# Altium PCB E1811SENSE_2.PcbDoc
Units mil, origin at the board's own origin, x right, y up, seen from the top; angles counter-clockwise.
Board outline 900 x 1630 mil, 4 copper layers (L1 (Sig), L2 (GND), L3 (GND), L4 (Sig)), stack 42.334 mil thick; 45 components, 35 nets, 181 pads, 52 vias.
Unrouted connection lines stored in the file: 11.
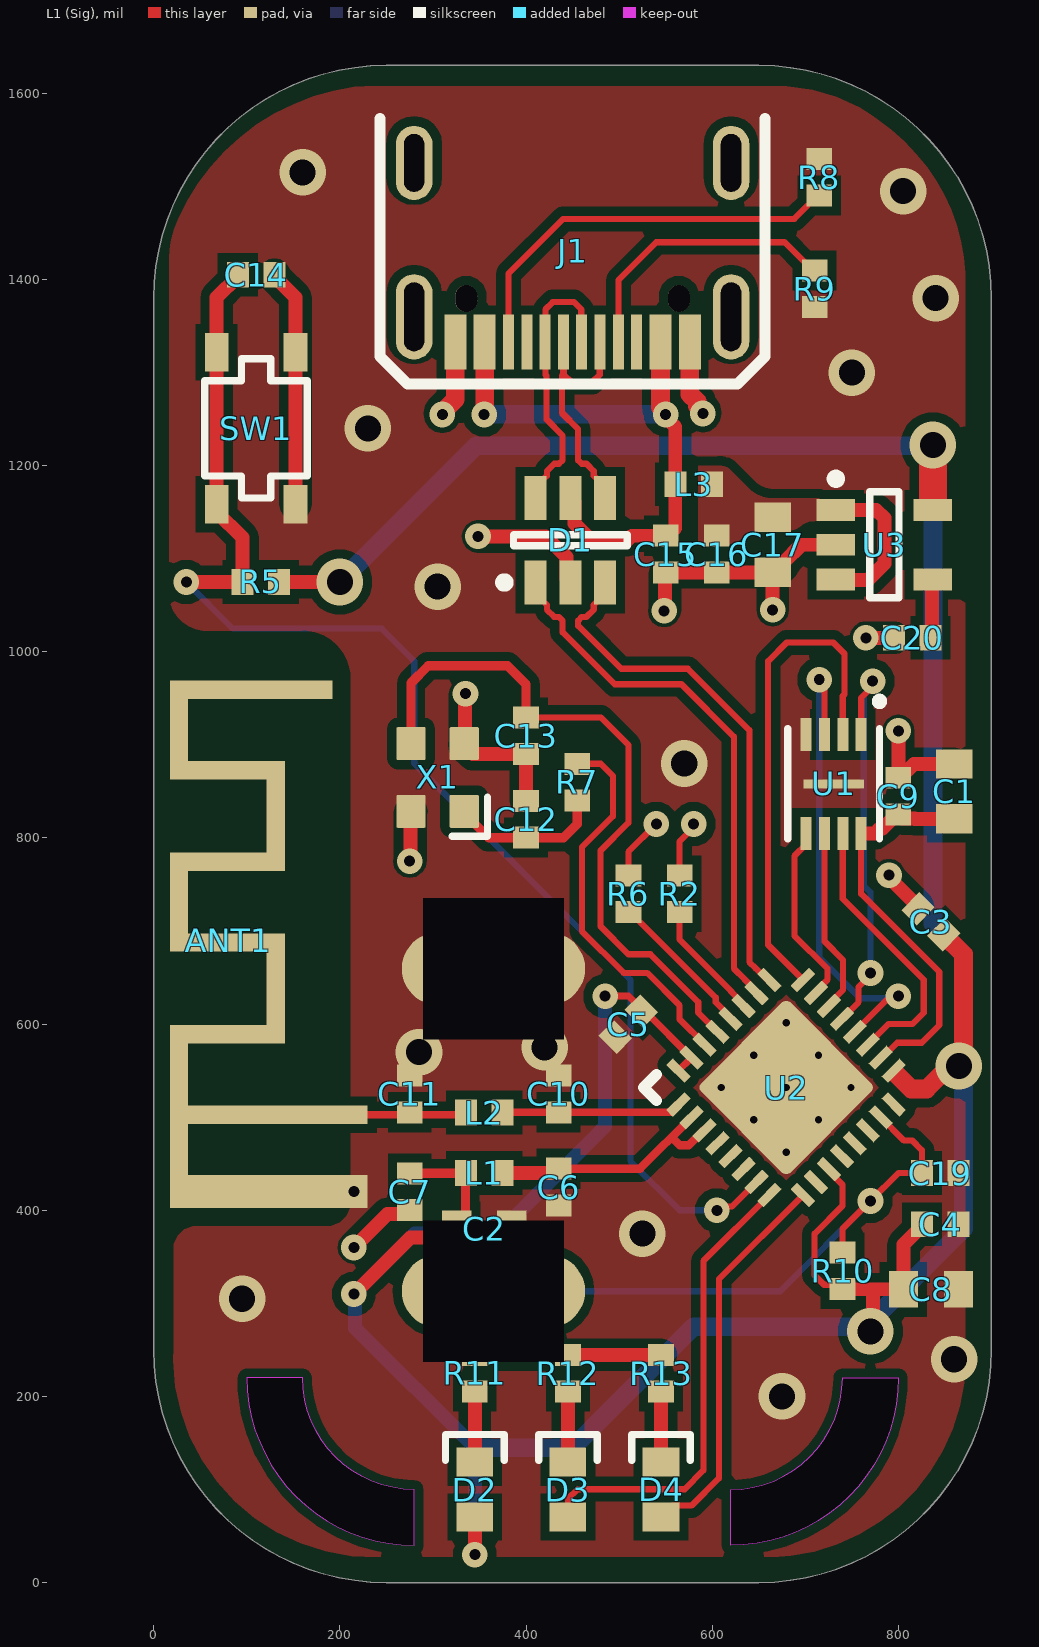
[diagram p0: L1 (Sig) view]
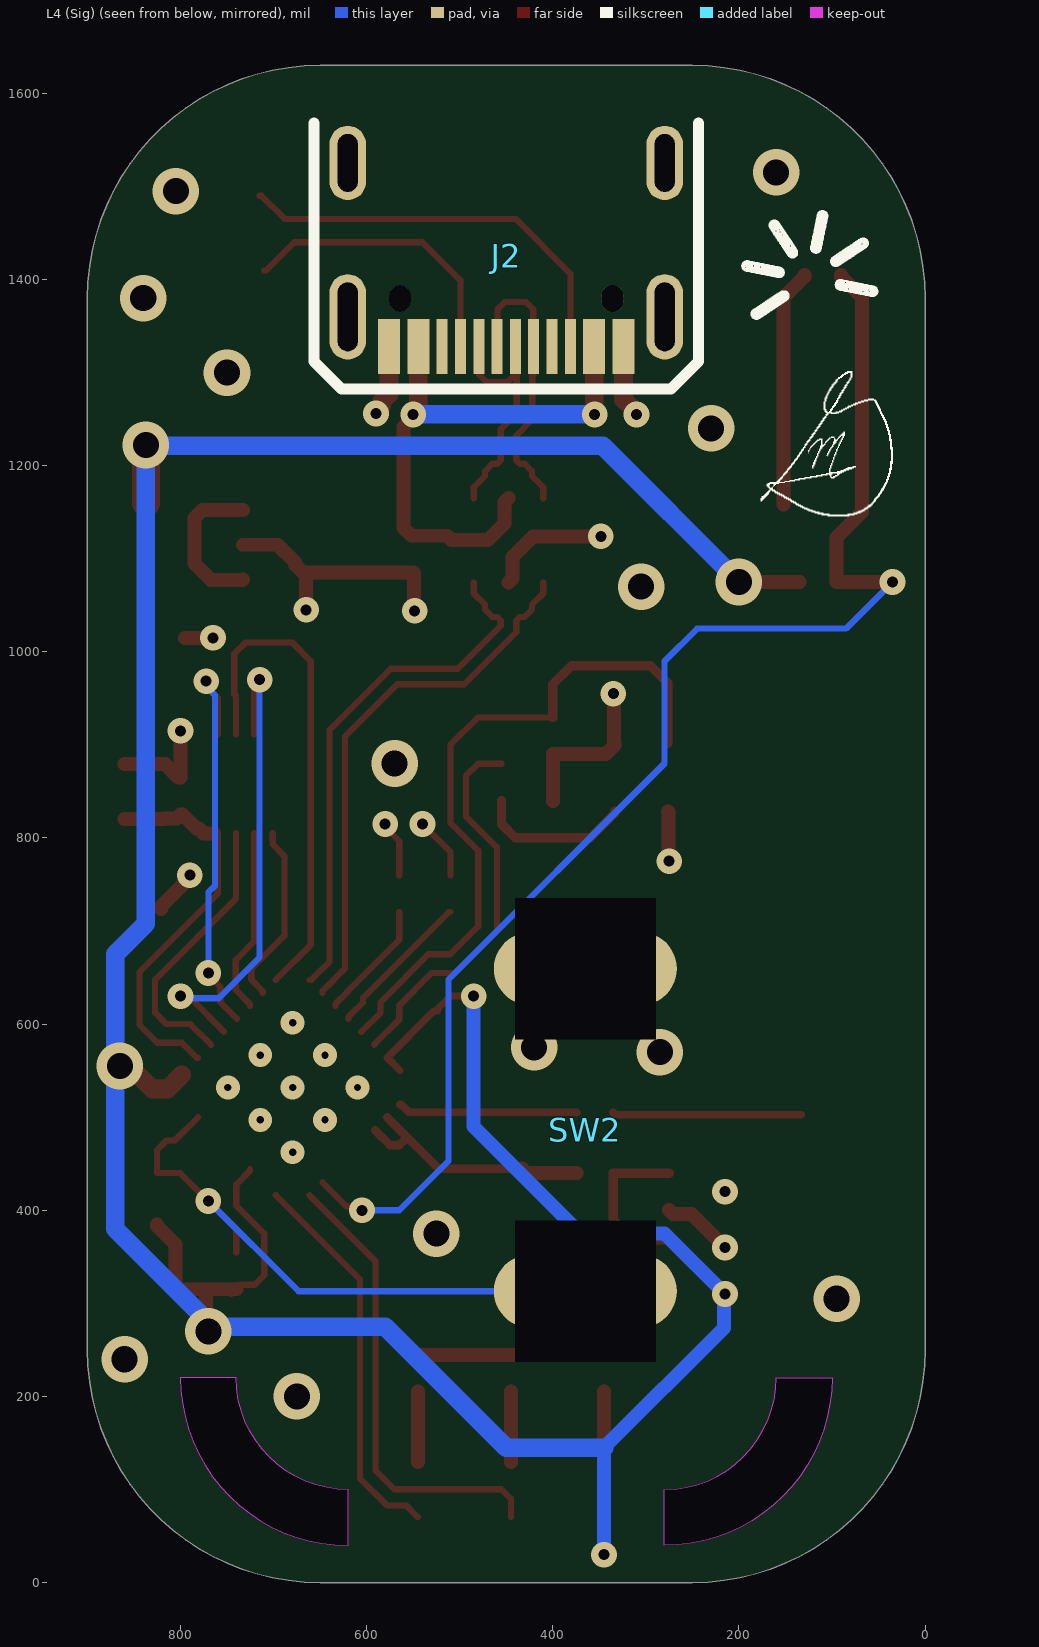
[diagram p1: L4 (Sig) view, seen from below]
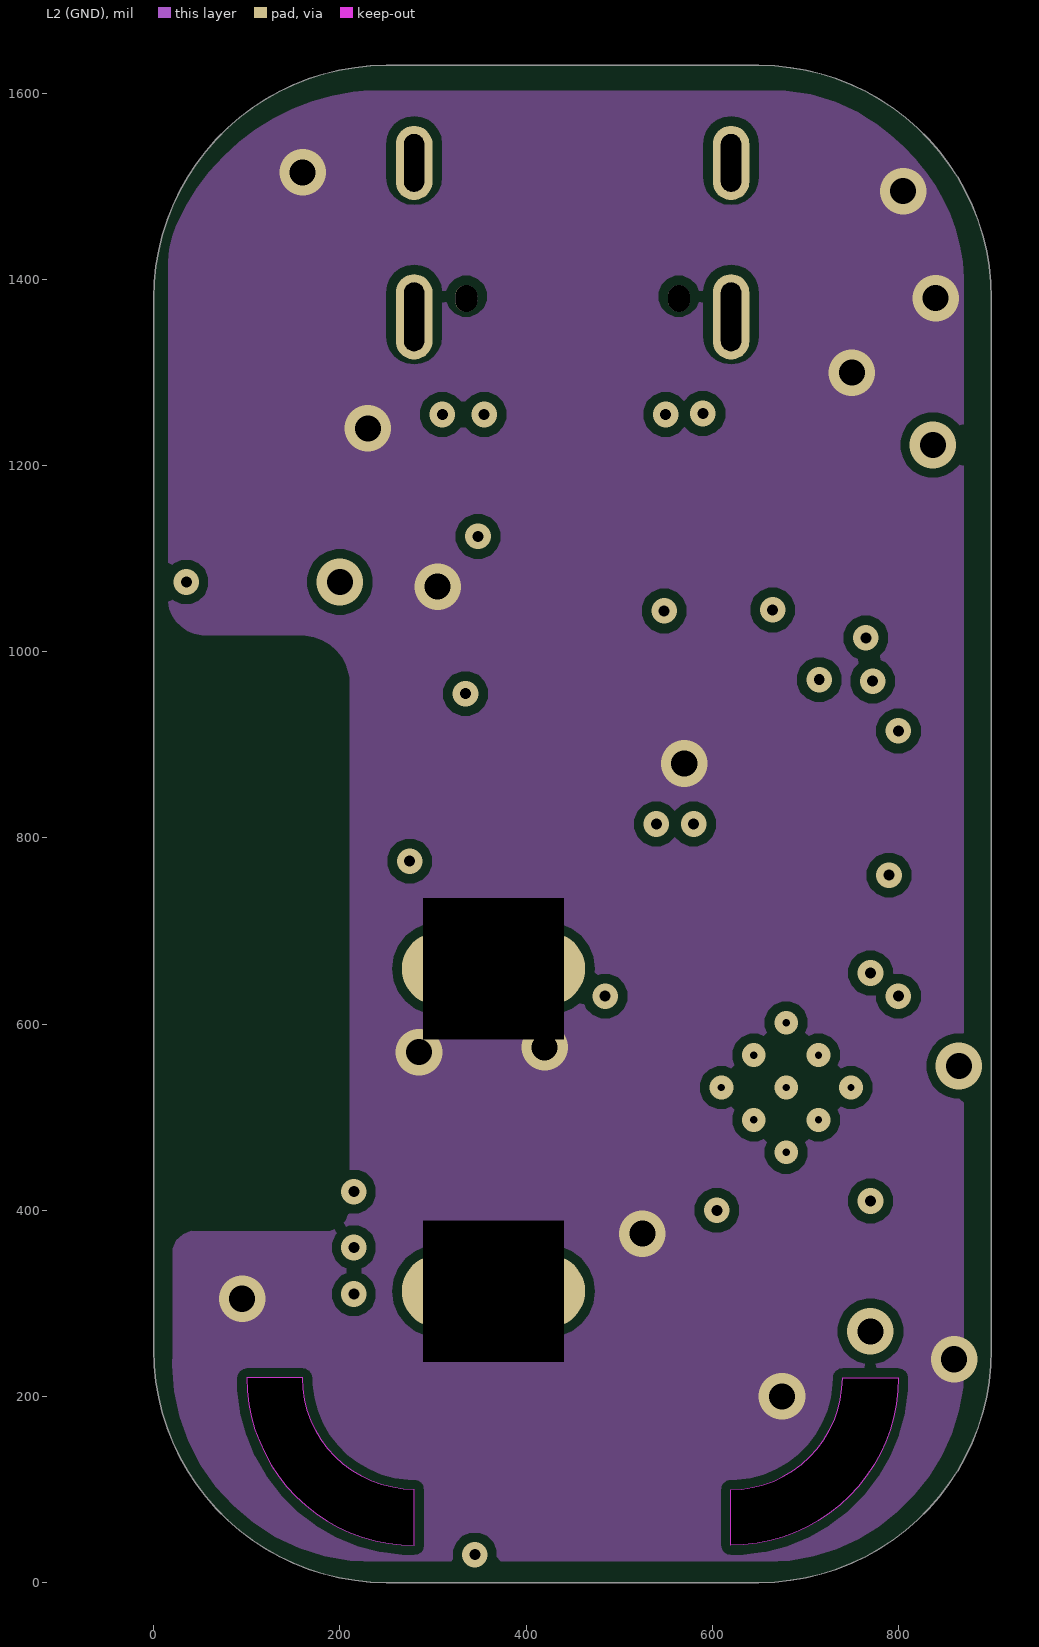
[diagram p2: L2 (GND)]
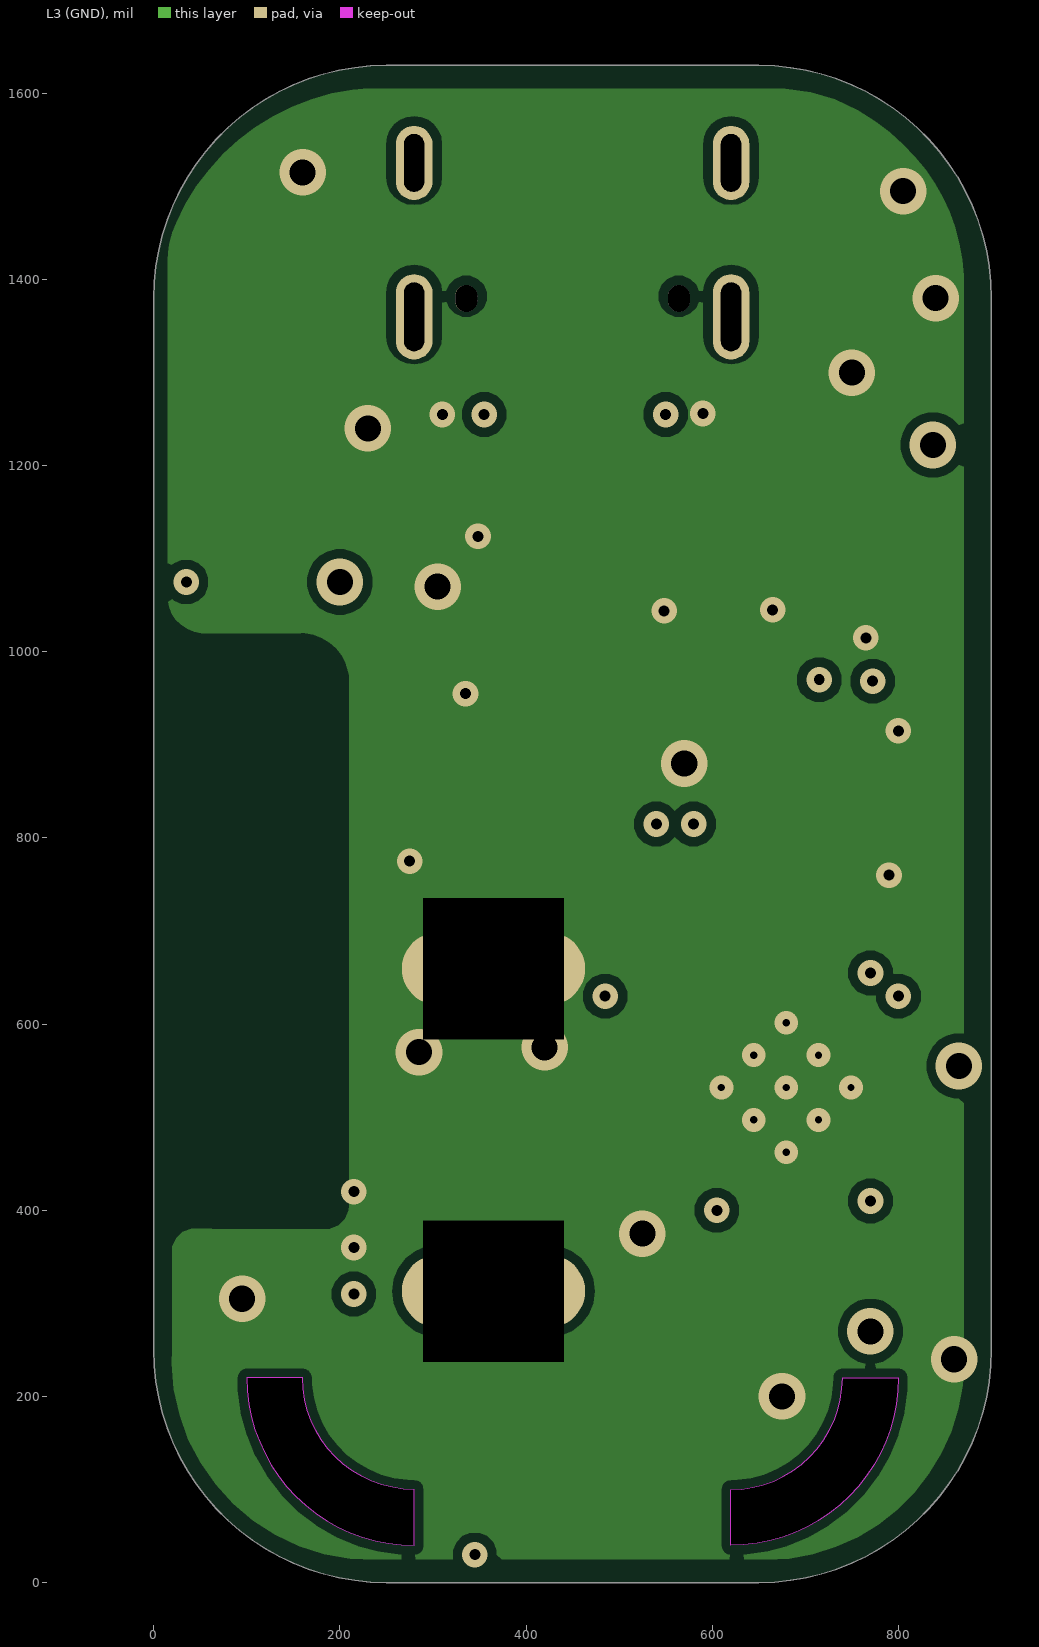
[diagram p3: L3 (GND)]
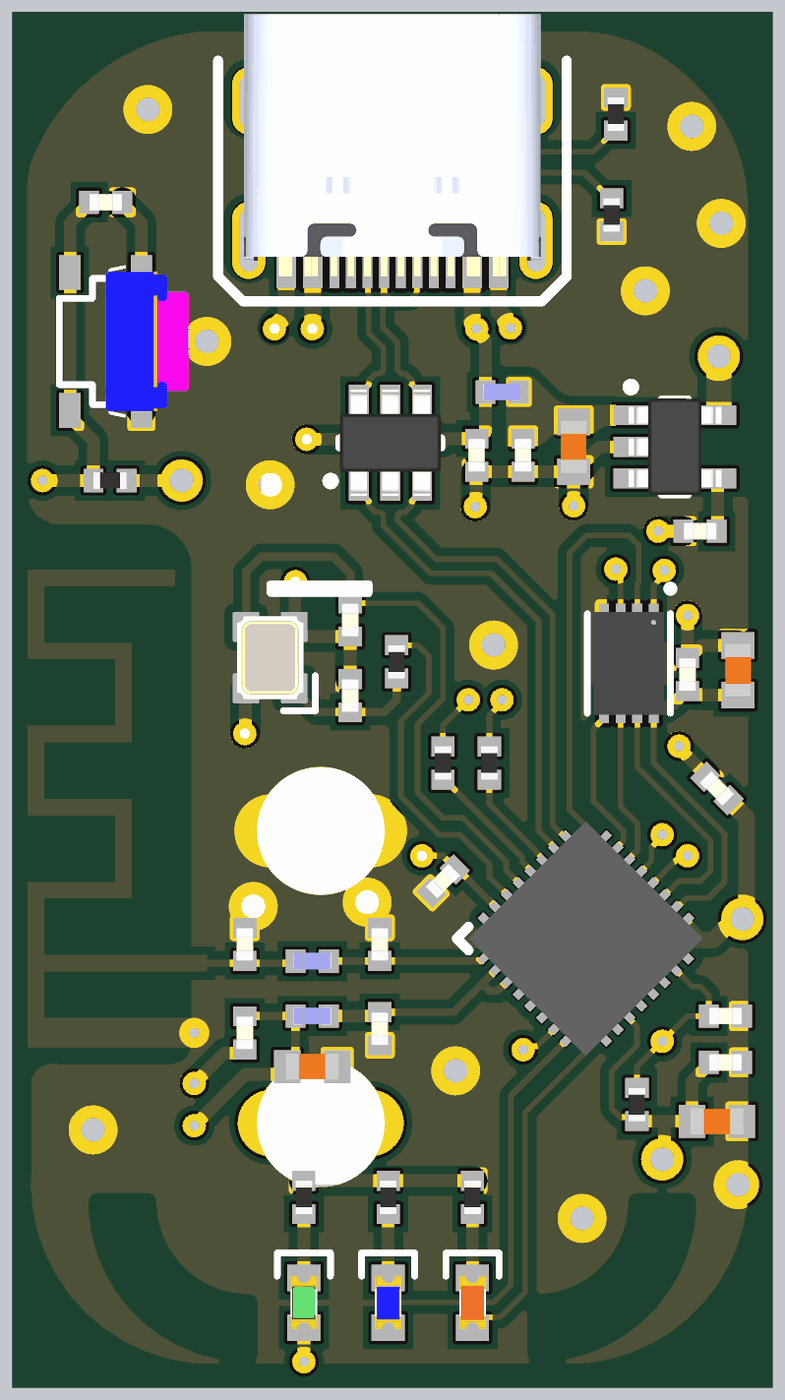
[diagram p4: 3D render of the assembled board from above, using the file's embedded part models]

## Layer stack, top to bottom
Top Solder: solder mask 0.4, Solder Resist, Dk 3.5
L1 (Sig): signal copper 1.378
Dielectric 1: prepreg 5.1, PP-017, Dk 4.3
L2 (GND): signal copper 0.689
Dielectric 3: core 28, Core-039, Dk 4.8
L3 (GND): signal copper 0.689
Dielectric 5: prepreg 5.1, PP-017, Dk 4.3
L4 (Sig): signal copper 1.378
Bottom Solder: solder mask 0.4, Solder Resist, Dk 3.5

## Board outline
0,250 ccw(c250,250) 250,0 650,0 ccw(c650,250) 900,250 900,1380 ccw(c650,1380) 650,1630 250,1630 ccw(c250,1380) 0,1380 0,1385
cut-out: 280,40 280,100 cw(c280,220) 160,220 100,220 ccw(c280,220)
cut-out: 620,40 620,100 ccw(c620,220) 740,220 800,220 cw(c620,220)

## Design rules (kind name [scope] priority, off if disabled: settings)
Clearance [All] p1: gap=10 ignorepadtopadclearanceinfootprint=FALSE except(0: Arc-Hole Track-Hole SMDPad-Hole THPad-Hole Via-Hole Fill-Hole Poly-Hole Region-Hole Text-Hole)
DiffPairsRouting [All] p1: maxlimit=10 minlimit=10 mostfreqgap=10 toplayer_minwidth=5 toplayer_maxwidth=15 toplayer_prefwidth=15 midlayer1_minwidth=5 midlayer1_maxwidth=15 midlayer1_prefwidth=15 midlayer2_minwidth=5 midlayer2_maxwidth=15 midlayer2_prefwidth=15 bottomlayer_minwidth=5 bottomlayer_maxwidth=15 bottomlayer_prefwidth=15 maxuncoupledlength=500
PlaneConnect [All] p1: planeconnectstyle=Direct reliefexpansion=20 reliefentries=4 reliefconductorwidth=10 reliefairgap=10
PolygonConnect [All] p1: connectstyle=Direct reliefconductorwidth=10 reliefentries=4 polygonreliefangle="90 Angle" airgapwidth=10
RoomDefinition E1811SENSE_1 [InComponentClass('E1811SENSE_1')] p1: confinementstyle=ConfineIn formatcopy=TRUE lockcomponents=FALSE outline 945,60 11180,60 11180,1265 945,1265
RoutingVias [All] p1: holewidth=28 width=50 viastyle="Through Hole" minholewidth=15 minwidth=10 maxholewidth=50 maxwidth=200
SolderMaskExpansion [All] p1: expansion=4 istentingtop=FALSE
Width [All] p1: maxlimit=50 minlimit=5 preferedwidth=10
28 further rules are at their usual default settings.

## Classes and differential pairs
differential pair class DIFF_USB: MCU_USB_D USB_D
differential pair USB_D: +USB_D_P -USB_D_N
differential pair MCU_USB_D: +MCU_USB_D_P -MCU_USB_D_N

## Components (designator, comment, footprint, x,y, rotation, side; value= is the part's Value field where it differs from the comment)
ANT1 "PCB Antenna 2.4GHz 50Ohm" ANT_IFA_USB_2_4GHZ_50R 229.92,420 r90 top
C1 "10u" CAP_0603 860,850 r270 top
C2 "10u" CAP_0603 355,380 r180 top
C3 "100n" CAP_0402 835,710 r315 top
C4 "100n" CAP_0402 845,385 r180 top
C5 "100n" CAP_0402 510,600 r45 top
C6 "100n" CAP_0402 435,425 r90 top
C7 "100n" CAP_0402 275,420 r90 top
C8 "10u" CAP_0603 835,315 r180 top
C9 "100n" CAP_0402 800,845 r270 top
C10 "3p3" CAP_0402 435,525 r270 top
C11 "3p3" CAP_0402 275,525 r270 top
C12 "10p" CAP_0402 400,820 r270 top
C13 "10p" CAP_0402 400,909.68 r90 top
C14 "100n" CAP_0402 110,1405 r180 top
C15 "100n" CAP_0402 550,1105 r90 top
C16 "100n" CAP_0402 605,1105 r90 top
C17 "10u" CAP_0603 665,1115 r90 top
C19 "100n" CAP_0402 845,440 r180 top
C20 "100n" CAP_0402 815,1015 r0 top
D1 "USBLC6-2SC6" STM-SOT23-6L_V 447.6,1119.72 r90 top
D2 "GREEN" LED_0603_GREEN 345,100 r270 top
D3 "BLUE" LED_0603_BLUE 445,100 r270 top
D4 "RED" LED_0603_RED 545,100 r270 top
J1 "TYPE-C-31-M-12" TYPE-C-31-M-12 450,1445 r180 top
J2 "TYPE-C-31-M-12" TYPE-C-31-M-12 450,1440 r0 bottom (schematic designator J1)
L1 "2n2" IND_0402 355,440 r0 top
L2 "2n2" IND_0402 355,505 r0 top
L3 "2n2" IND_0402 580,1180 r180 top
R2 "470R" RES_0402 565,740 r270 top
R5 "5k1" RES_0402 115,1075 r0 top
R6 "470R" RES_0402 510,740 r270 top
R7 "22R" RES_0402 455,860 r270 top
R8 "5k1" RES_0402 715,1509.68 r90 top
R9 "5k1" RES_0402 710,1390 r270 top
R10 "5k1" RES_0402 740,335 r270 top
R11 "1k" RES_0402 345,225 r270 top
R12 "1k" RES_0402 445,225 r270 top
R13 "1k" RES_0402 545,225 r270 top
SW1 "SKRPANE010" SKRPANE010 110,1240 r270 top
SW2 "SS-5GL111-3" SS-5GL1131-3 365,630 r180 bottom
U1 "W25Q16JVUXIQ" USON-8-2X3MM 730.47,858.15 r270 top
U2 "ESP32-C3" QFN32-5x5 679.47,531.9 r45 top
U3 "SPX3819M5-L-3-3/TR" SOT-23-5 785,1115 r0 top
X1 "40MHz" XTAL_2520 305,865 r270 top

## Footprints (in the part's own frame and the unit in brackets; to place one, negate y for a bottom-side part, rotate by r counter-clockwise, add the part's x,y. Pads: shape width x height; smd on the part's side, far side on the other; paste and mask are expansions set on the pad)
ANT_IFA_USB_2_4GHZ_50R [mm]
  rect 5x0.5 smd paste-2539.97 mask+0.102: 1(2.05,5.15)
  rect 0.5x4.9 smd paste-2539.97 mask+0.102: 1(2.1,2.45)
  rect 0.5x2.64 smd paste-2539.97 mask+0.102: 1(4.3,3.58) 1(6.8,3.58) 1(9,3.58) 1(11.5,3.58)
  rect 2x0.5 smd paste-2539.97 mask+0.102: 1(5.55,2.51) 1(10.25,2.51)
  rect 2.7x0.5 smd paste-2539.97 mask+0.102: 1(7.9,5.15) 1(12.6,5.15)
  rect 0.5x3.94 smd paste-2539.97 mask+0.102: 1(13.7,2.93)
  rect 0.9x4.9 smd paste-2539.97 mask+0.102: 2(0,2.45)
CAP_0402 [mm]
  rect 0.6x0.7 smd: 1(-0.5,0) 2(0.5,0)
  body extent -0.5,-0.26 0.5,0.26, height 0.37
CAP_0603 [mm]
  rect 0.8x1 smd: 1(-0.75,0) 2(0.75,0)
  body extent -0.8,-0.4 0.8,0.4, height 0.51
IND_0402 [mm]
  rect 0.6x0.7 smd: 1(-0.5,0) 2(0.5,0)
  body extent -0.56,-0.26 0.56,0.26, height 0.67
LED_0603_BLUE [mm]
  rect 0.8x1 smd: A(0.75,0) K(-0.75,0)
  silkscreen extent -1.5,-0.8 -0.8,0.8, body extent -0.8,-0.4 0.8,0.4, height 0.6
LED_0603_GREEN [mm]
  rect 0.8x1 smd: A(0.75,0) K(-0.75,0)
  silkscreen extent -1.5,-0.8 -0.8,0.8, body extent -0.8,-0.4 0.8,0.4, height 0.6
LED_0603_RED [mm]
  rect 0.8x1 smd: A(0.75,0) K(-0.75,0)
  silkscreen extent -1.5,-0.8 -0.8,0.8, body extent -0.8,-0.4 0.8,0.4, height 0.6
QFN32-5x5 [mm]
  rrect10% 0.7x0.25 smd mask+0.05: 1(-2.4,1.75) 2(-2.4,1.25) 3(-2.4,0.75) 4(-2.4,0.25) 5(-2.4,-0.25) 6(-2.4,-0.75) 7(-2.4,-1.25) 8(-2.4,-1.75) 17(2.4,-1.75) 18(2.4,-1.25) 19(2.4,-0.75) 20(2.4,-0.25) 21(2.4,0.25) 22(2.4,0.75) 23(2.4,1.25) 24(2.4,1.75)
  rrect10% 0.25x0.7 smd mask+0.05: 9(-1.75,-2.4) 10(-1.25,-2.4) 11(-0.75,-2.4) 12(-0.25,-2.4) 13(0.25,-2.4) 14(0.75,-2.4) 15(1.25,-2.4) 16(1.75,-2.4) 25(1.75,2.4) 26(1.25,2.4) 27(0.75,2.4) 28(0.25,2.4) 29(-0.25,2.4) 30(-0.75,2.4) 31(-1.25,2.4) 32(-1.75,2.4)
  rrect10% 3.45x3.45 smd mask+0.07: 33(0,0)
  silkscreen extent -2.75,2.25 -2.25,2.75, body extent -2.5,-2.5 2.5,2.5, height 0.85
RES_0402 [mm]
  rect 0.6x0.7 smd: 1(-0.5,0) 2(0.5,0)
  body extent -0.5,-0.25 0.5,0.25, height 0.3
SKRPANE010 [mm]
  rect 1.05x0.65 smd: 12(-2.075,1.075) 12(2.075,1.075) 34(-2.075,-1.075) 34(2.075,-1.075)
  silkscreen extent -1.9,-1.4 1.9,1.4, body extent -2.3,-1.6 2.3,1.6, height 2.51
SOT-23-5 [mm] "SOT23, 5-Leads, Body 2,90x2,80mm, Pitch 0,95mm, IPC Medium Density"
  rect 1.05x0.6 smd: 1(-1.325,0.95) 2(-1.325,0) 3(-1.325,-0.95) 4(1.325,-0.95) 5(1.325,0.95)
  silkscreen extent -1.45,-1.45 0.4,1.92, body extent -1.4,-1.45 1.4,1.45, height 1.45
SS-5GL1131-3 [mm]
  oval 5x2 hole 3.84 square: 1(0,0.75) 2(0,-8.05)
  body extent -3.2,-9.9 3.32,17.8, height 11.85
STM-SOT23-6L_V [mm] "SOT23, 6-Leads, Body 3.05x1.75mm, Pitch 0.95mm"
  rect 1.2x0.6 smd: 1(-1.15,0.95) 2(-1.15,0) 3(-1.15,-0.95) 4(1.15,-0.95) 5(1.15,0) 6(1.15,0.95)
  silkscreen extent -1.27,-1.55 0.15,1.92, body extent -1.6,-1.53 1.6,1.53, height 1.45
TYPE-C-31-M-12 [mm]
  rect 0.6x1.5 smd mask+0.07: A1B12(-3.2,2.85) B1A12(3.2,2.85)
  rect 0.6x1.5 smd mask+0.14: A4B9(-2.4,2.85) B4A9(2.4,2.85)
  rect 0.3x1.5 smd mask+0.14: A5(-1.25,2.85) A6(-0.25,2.85) A7(0.25,2.85) A8(1.25,2.85) B5(1.75,2.85) B6(0.75,2.85) B7(-0.75,2.85) B8(-1.75,2.85)
  round 0.6 hole 0.6 unplated mask+0.3: MH(-2.9,1.6) MH(2.9,1.6)
  oval 1x1.9 hole 0.55 slot 1.45 at 90 deg mask+0.05: SH(-4.325,-2.1) SH(4.325,-2.1)
  oval 1x2.2 hole 0.55 slot 1.75 at 90 deg mask+0.05: SH(-4.325,2.1) SH(4.325,2.1)
  silkscreen extent -5.25,-3.25 5.25,4, body extent -4.47,-4.65 4.47,3.25, height 3.32
USON-8-2X3MM [mm]
  rect 0.9x0.3 smd mask+0.13: 1(-1.35,0.75) 2(-1.35,0.25) 3(-1.35,-0.25) 4(-1.35,-0.75) 5(1.35,-0.75) 6(1.35,-0.25) 7(1.35,0.25) 8(1.35,0.75)
  rect 0.25x1.65 smd paste-0.1: 9(0,0)
  silkscreen extent -2.35,-1.25 1.5,1.35, body extent -1.55,-1.05 1.55,1.05, height 0.61
XTAL_2520 [mm]
  rrect10% 0.9x0.8 smd mask+0: 1(-0.925,-0.725) 2(0.925,-0.725) 3(0.925,0.725) 4(-0.925,0.725)
  silkscreen extent 0.54,0.4 1.6,1.36, body extent -1.25,-1 1.25,1, height 0.8

## Part data
ANT1: library part ANT_IFA_USB_2_4GHZ_50R, "Inverted F 2.4GHz ISM PCB Antenna 50 Ohm", ComponentLink1Description=Datasheet, ComponentLink1URL=https://www.ti.com/lit/an/swra117d/swra117d.pdf
C1 C2 C8 C17: library part CAP_0603_10V, "Capacitor SMD 0603 10V", LCSC=C19702, Manufacturer=Samsung, Manufacturer Part Number=CL10A106KP8NNNC
C3 C4 C5 C6 C7 C9 C14 C15 C16 C19 C20: library part CAP_0402_50V, "Capacitor SMD 0402 50V", LCSC=C1525, Manufacturer=Samsung, Manufacturer Part Number=CL05B104KO5NNNC
C10 C11: library part CAP_0402_50V, "Capacitor SMD 0402 50V", LCSC=C1565, Manufacturer=FH, Manufacturer Part Number=0402CG3R3C500NT
C12 C13: library part CAP_0402_50V, "Capacitor SMD 0402 50V", LCSC=C32949, Manufacturer=Samsung, Manufacturer Part Number=CL05C100JB5NNNC
D1: library part CMP-2000-05378-1, "Very low capacitance ESD protection, 3.5 pF, -40 to 125 degC, 6-Pin SOT23, RoHS, Tape and Reel", Capacitance Value=3.5pF, Clamping Voltage=17V, LCSC=C7519, Leakage Current=0.15uA, Manufacturer=STMicroelectronics, Operating Temp Range=-40Cto125C, Operating Temperature Classification=Automotive, Operating Temperature Max Deg. C=125C, Operating Temperature Min Deg. C=-40C, Package / Case=SOT-23, Package Description="6-Pin Small Outline Transistor, Body 2.925 x 1.625 mm, Pitch 0.95 mm", Package Reference=SOT23-6L, Peak Pulse Current=5A, Reverse Breakdown Voltage=6V, Reverse Stand-off Voltage=5V, Test Current (It)=1mA, Clamping Voltage (Max)=17V, Configuration=Dual, Datasheet URL=http://www.st.com/st-web-ui/static/active/en/resource/technical/document/datasheet/CD00050750.pdf, Datasheet Version="Rev. 5, 10/2011", Direction Type=Uni-Directional, Leakage Current (Max)=0.15uA, Manufacturer URL=http://www.st.com/, Mounting=SurfaceMount, Mounting Style=SurfaceMount, Number of Elements=1, Packaging=TapeandReel, Pin Count=6, Polarity=Uni-Directional, Product Depth (mm)=1.75mm, Product Height (mm)=1.3mm, Product Length (mm)=3.05mm, Rad Hardened=No, Suppressor Type=DiodeArrays, Working Voltage=5V, Working Voltage (Max)=5V
D2: library part LED_0603_GREEN, "LED 0603 GREEN SMD", LCSC=C72043
D3: library part LED_0603_BLUE, "LED 0603 BLUE SMD"
D4: library part LED_0603_RED, "LED 0603 RED SMD"
J1 J2: "USB Type C Connector Horizontal SMT", LCSC=C165948, Manufacturer="Koren Hroparts", Manufacturer Part Number=TYPE-C-31-M-12
L1 L2 L3: library part IND_0402, "Inductor SMD 0402", LCSC=C412264, Manufacturer=Murata, Manufacturer Part Number=LQW15AN2N2G80D
R2 R6 R11 R12 R13: library part RES_0402, "Resistor SMD 0402", LCSC=C25117, Manufacturer=UNI-ROYAL, Manufacturer Part Number=0402WGF4700TCE
R5 R8 R9 R10: library part RES_0402, "Resistor SMD 0402", LCSC=C105873, Manufacturer=YAGEO, Manufacturer Part Number=RC0402JR-075K1L
R7: library part RES_0402, "Resistor SMD 0402", LCSC=C25092, Manufacturer=UNI-ROYAL, Manufacturer Part Number=0402WGF220JTCE
SW1: "Tactile Switch SMD SPST", LCSC=C470426, Manufacturer="Alps Alpine", Manufacturer Part Number=SKRPANE010
U1: "16M-BIT SERIAL FLASH MEMORY WITH / DUAL/QUAD SPI USON-8", LCSC=C2843335, Manufacturer=Winbond, Manufacturer Part Number=W25Q16JVUXIQ
U2: "Ultra­Low­Power SoC with RISC­V Single­Core CPU Supporting IEEE 802.11b/g/n (2.4 GHz Wi­Fi) and Bluetooth® 5 (LE)", LCSC=C2838500, Manufacturer=Espressif, Manufacturer Part Number=ESP32-C3
U3: "500mA +3.3V Low-Noise LDO Voltage Regulator", LCSC=C9055, Manufacturer=MaxLinear, Manufacturer Part Number=SPX3819M5-L-3-3/TR
X1: library part XTAL_2520, "Crystal SMD 2520", LCSC=C255973, Manufacturer="Seiko Epson", Manufacturer Number=Q24FA20H0020900, Frequency=40MHz

## Via types
v1: diameter 27.56, hole 11.81, L1 (Sig) to L4 (Sig), 26 vias
v2: diameter 50, hole 28, L1 (Sig) to L4 (Sig), 17 vias
v3: diameter 25.59, hole 7.87, L1 (Sig) to L4 (Sig), tented both sides, 9 vias

## Nets (pads, with @x,y where several pads share a name; then routed paths per layer and width w, separated by ;. In a path a pad name is that pad's centre, name@x,y a point inside that pad or via, vN(x,y) a via of type N, cw(c..) or ccw(c..) an arc to the next point about the centre after c; other vN are vias at no path point)
+3V3: C2.2 C3.2 C4.2 C5.2 C7.2 C8.2 D2.A L1.1 R5.2 R10.2 U2.11 U2.17 U2.31 U2.32 U3.5 | length 4159.8
  L1 (Sig) w6.69: U2.11 725.4,442.21 740,427.61 740,405 710,375 710,330.19 720.1,320.09 735.23,320.09 R10.2 ; R10.2@742.5,312.81 R10.2@745.31,310
  L1 (Sig) w7.5: v1(485,630) 510,630 523.92,616.08 C5.2 527.86,613.92 U2.31 U2.32
  L1 (Sig) w10: C7.2 275.16,439.84 L1.1@335.16,439.84 ; C2.2 335,389.53 335,439.68 L1.1@335.16,439.84 ; L1.1 L1.1@335.16,439.84
  L1 (Sig) w15: R5.2 v2(200,1075) ; v1(215,310) 276,371 317.22,371 325.47,379.25 C2.2 ; v1(345,30) D2.A ; R10.2 740.16,315.16 772.74,315.16 ; v2(770,270) 772.74,272.74 772.74,315.16 ; C4.2 825.31,383.03 805.47,363.19 C8.2 805.31,315.16 772.74,315.16
  L1 (Sig) w20: 798.48,545.57 813.74,530.31 830.31,530.31 870,570 870,675 C3.2
  L1 (Sig) w30: U3.5@837.17,1160 v2(837.17,1222.17)
  L4 (Sig) w15: v1(345,30) 345,145 216.28,273.72 216.28,308.72 v1(215,310) 280,375 370,375 485,490 v1(485,630)
  L4 (Sig) w20: v2(200,1075) 346.22,1221.22 836.22,1221.22 v2(837.17,1222.17) 837.17,707.83 870,675 870,380 765,275 580,275 450,145 345,145
  other v2: 865,555
+3V3_RF: C6.2 L1.2 U2.2 U2.3 | length 268.4
  L1 (Sig) w6.69: C6.2@433.03,444.69 C6.2 ; U2.3@590.97,485.97 U2.3
  L1 (Sig) w9: C6.2 522.65,444.69 U2.2 ; 560,475 565,470 575,470 U2.3@590.97,485.97
  L1 (Sig) w15: L1.2 428.35,440 C6.2@433.03,444.69
+VBUS: C15.2 D1.5 J1.A4B9 J1.B4A9 J2.A4B9 J2.B4A9 L3.2 | length 629.4
  L1 (Sig) w15: D1.5 451.91,1160.69 451.91,1137.91 469.82,1120 509.04,1120 513.72,1124.69 C15.2 551.97,1124.69 560.31,1133.03 L3.2 560.31,1241.29 550,1251.6 v1(550,1255)
  L1 (Sig) w20: v1(355,1255) 355.51,1255.51 J1.B4A9 ; J1.A4B9 544.49,1262.56 550,1257.05 v1(550,1255)
  L4 (Sig) w20: v1(355,1255) v1(550,1255)
+VBUS_FILT: C16.2 C17.2 L3.1 U3.1 U3.3 | length 164.1
  L1 (Sig) w15: U3.3 733.22,1077.22 767.22,1077.22 785,1095 785,1143.61 776.21,1152.4 U3.1
+VCC_SPI: C1.2 C9.2 U1.8 U2.18 | length 424.8
  L1 (Sig) w6.69: U1.8 760,740 843.92,656.08 843.92,598.92 825,580 798.68,580 782.6,563.92 U2.18
  L1 (Sig) w15: U1.8@763.75,805 775,805 780,810 782.72,810 798.03,825.31 C9.2 804.31,821 817.28,821 817.81,820.47 C1.2
ANT_RF: ANT1.1 C11.2 L2.1 | length 202.8
  L1 (Sig) w8.5: ANT1.1@133.46,502.68 332.99,502.68 L2.1
CHIP_EN: C14.2 R5.1 SW1.34 U2.7 | length 1494.4
  L1 (Sig) w6.69: v1(605,400) 608.99,403.99 621.15,403.99 U2.7
  L1 (Sig) w15: v1(35,1075) R5.1 95.32,1122.8 67.68,1150.43 67.68,1158.31 67.68,1321.69 67.68,1380.39 90.31,1403.03 C14.2
  L4 (Sig) w6.69: v1(35,1075) 85,1025 245,1025 280,990 280,880 512.13,647.87 512.13,452.87 565,400 v1(605,400)
GND: ANT1.2 C1.1 C2.1 C3.1 C4.1 C5.1 C6.1 C7.1 C8.1 C9.1 C10.1 C11.1 C12.1 C13.1 C14.1 C15.1 C16.1 C17.1 C19.1 C20.1 D1.2 J1.A1B12 J1.B1A12 J2.A1B12 J2.B1A12 R8.2 R9.2 R11.1 R12.1 R13.1 SW1.12 SW2.1 U1.4 U1.9 U2.33 U3.2 X1.2 X1.4 | length 1538.2
  L1 (Sig) w15: C14.1 129.68,1403.03 152.32,1380.39 152.32,1321.69 SW1.12@152.32,1158.31 ; v1(215,360) 251,396 270.69,396 C7.1 ; v1(275,775) 275.73,775.73 275.73,827.85 X1.2 ; v1(335,955) 334.27,954.27 334.27,902.15 X1.4 333.54,899.45 342.99,890 C13.1 C12.1 ; R11.1 R12.1 R13.1 ; v1(348.39,1123.96) 348.47,1123.88 421.12,1123.88 443.29,1101.71 443.29,1078.76 D1.2 ; v1(548.39,1043.96) 549.19,1044.77 549.19,1084.51 C15.1 550.08,1085.39 664.92,1085.39 C17.1 ; v1(665,1045) C17.1 ; U3.2 695.65,1115 677.19,1096.53 677.19,1093.72 668.94,1085.47 C17.1 ; v1(765,1015) C20.1 ; v1(790,760) 790,757.5 821.08,726.42 C3.1 ; v1(800,915) C9.1 801.97,864.68 816.81,879.53 C1.1
  L1 (Sig) w20: v1(310,1255) 310,1257.05 324.02,1271.06 J1.B1A12 ; J1.A1B12 575.98,1276.79 583.78,1268.99 583.78,1264.21 590,1257.99 v1(590,1255.94)
  other v1: 215,420
  other v2: 675,200 860,240 95,305 525,375 285,570 420,575 570,880 305,1070 230,1240 750,1300 840,1380 805,1495 160,1515
  other v3: 679.47,462.31 644.67,497.11 714.27,497.11 609.87,531.9 679.47,531.9 749.07,531.9 644.67,566.7 714.27,566.7 679.47,601.5
GPIO9: C19.2 R10.1 SW2.2 U2.15 | length 664.1
  L1 (Sig) w6.69: R10.1 740,380 v1(770,410) 800,440 C19.2 825.31,464.69 815,475 805.97,475 U2.15
  L4 (Sig) w6.69: SW2.2 673.07,313.07 v1(770,410)
LDO_BYP: C20.2 U3.4 | length 63.6
  L1 (Sig) w15: C20.2 835.93,1016.24 835.93,1076.36 U3.4
LED_3V3_K: D2.K R11.2 | length 75.8
  L1 (Sig) w15: D2.K R11.2
LED_A: D3.A U2.8 | length 502.9
  L1 (Sig) w6.69: D3.A 445,90 455.43,100.43 570.43,100.43 590.51,120.51 590.51,345.51 U2.8
LED_A_K: D3.K R12.2 | length 75.8
  L1 (Sig) w15: D3.K R12.2
LED_B: D4.A U2.9 | length 421.1
  L1 (Sig) w6.69: D4.A 557.4,82.87 577.87,82.87 607.2,112.2 607.2,326.01 U2.9
LED_B_K: D4.K R13.2 | length 75.8
  L1 (Sig) w15: D4.K R13.2
LNA_IN: C10.2 L2.2 U2.1 | length 192.9
  L1 (Sig) w8.5: L2.2 375,505.31 C10.2 554.49,505.31 562.99,513.81 U2.1
MCU_UART0_RX: R2.2 U2.27 | length 129.1
  L1 (Sig) w6.69: R2.2 565,690.89 620.47,635.42 620.47,634.67 633.53,621.6 U2.27
MCU_UART0_TX: R6.2 U2.28 | length 161.2
  L1 (Sig) w6.69: R6.2 511.97,720.31 603.78,628.5 603.78,623.52 619.62,607.68 U2.28
MCU_USB_D_N: D1.3 U2.25 | length 570.4
  L1 (Sig) w6.69: D1.3 485,1062.64 472.76,1050.39 472.76,1045.3 464.94,1037.48 459.87,1037.48 455.94,1033.56 455.94,1028.02 502.21,981.75 573.93,981.75 640,915.68 640,666.69 646.81,659.88 646.92,659.88 659.37,647.44 U2.25
MCU_USB_D_P: D1.1 U2.26 | length 584.2
  L1 (Sig) w6.69: D1.1 410.2,1062.64 422.44,1050.39 422.44,1045.3 430.26,1037.48 435.33,1037.48 439.25,1033.56 439.25,1021.1 495.29,965.06 567.01,965.06 623.31,908.77 623.31,659.78 635.01,648.08 635.01,647.97 647.45,635.52 U2.26
SPI_CLK: U1.6 U2.22 | length 200
  L1 (Sig) w6.69: U1.6 720.63,688.8 740.62,668.81 740.62,636.82 725.4,621.6 U2.22
SPI_DI: U1.5 U2.23 | length 196.6
  L1 (Sig) w6.69: U1.5 700.94,793.19 688.36,780.6 688.36,695 723.93,659.43 723.93,647.97 711.48,635.52 U2.23
SPI_DO: U1.2 U2.24 | length 540.9
  L1 (Sig) w6.69: U2.24 660,685 660,990 680,1010 730,1010 742.13,997.87 742.13,954.36 740.32,952.55 U1.2
SPI_NCS: U1.1 U2.21 | length 444.6
  L1 (Sig) w6.69: U2.21 757.31,623.66 757.31,640 770,652.69 v1(770,655) ; U1.1 760,950.43 772.37,962.8 v1(772.37,968.45)
  L4 (Sig) w6.69: v1(770,655) 770,741.64 762.88,748.76 762.88,953.3 772.37,962.8 v1(772.37,968.45)
SPI_NHLD: U1.7 U2.19 | length 303.1
  L1 (Sig) w6.69: U1.7 740.32,734.68 827.23,647.77 827.23,612.23 815,600 789.32,600 U2.19
SPI_NWP: U1.3 U2.20 | length 526
  L1 (Sig) w6.69: v1(715,970) 715,964.35 720.63,958.72 U1.3 ; U2.20 787.49,626.01 796.01,626.01 v1(800,630)
  L4 (Sig) w6.69: v1(715,970) 715,671.64 726.64,660 758.76,627.88 797.88,627.88 v1(800,630)
UART0_RX: R2.1 | length 61.5
  L1 (Sig) w6.69: R2.1 565,796.31 580,811.31 v1(580,815)
UART0_TX: R6.1 | length 67.7
  L1 (Sig) w6.69: R6.1 510,785 v1(540,815)
USB_A5: J1.A5 J2.A5 R9.1 | length 306.7
  L1 (Sig) w6.69: J1.A5 499.21,1399.21 540,1440 677.72,1440 708.03,1409.68 R9.1
USB_B5: J1.B5 J2.B5 R8.1 | length 442
  L1 (Sig) w6.69: J1.B5 381.1,1406.1 440,1465 688.03,1465 713.03,1490 R8.1
USB_D_N: D1.4 J1.A7 J1.B7 J2.A7 J2.B7 | length 306
  L1 (Sig) w6.69: J1.B7 479.09,1332.36 479.09,1297.74 471.28,1289.92 448.41,1289.92 440.59,1297.74 440.59,1332.36 J1.A7 439.72,1332.36 439.72,1297.74 438.66,1296.68 438.66,1256.53 455.94,1239.25 455.94,1205.89 459.87,1201.97 464.94,1201.97 472.76,1194.15 472.76,1189.06 485,1176.81 D1.4
USB_D_P: D1.6 J1.A6 J1.B6 J2.A6 J2.B6 | length 306
  L1 (Sig) w6.69: D1.6 410.2,1176.81 422.44,1189.06 422.44,1194.15 430.26,1201.97 435.33,1201.97 439.25,1205.89 439.25,1232.33 421.97,1249.62 421.97,1296.68 420.91,1297.74 420.91,1332.36 J1.B6 420.91,1333.23 420.91,1367.85 428.72,1375.67 451.59,1375.67 459.41,1367.85 459.41,1333.23 J1.A6
XTAL_IN: C12.2 R7.2 X1.3 | length 165.7
  L1 (Sig) w10: X1.3 333.54,826.61 359.84,800.31 C12.2 440.31,800.31 455,815 R7.2
XTAL_N: C13.2 U2.29 X1.1 | length 748.9
  L1 (Sig) w6.69: C13.2 480.63,929.37 510,900 510,816.39 480,786.39 480,705 510,675 533.68,675 585,623.68 585,612.45 U2.29
  L1 (Sig) w10: X1.1 276.46,966.46 295,985 380,985 400,965 C13.2
XTAL_P: R7.1 U2.30 | length 415.6
  L1 (Sig) w6.69: R7.1 480.32,879.68 493.31,866.69 493.31,823.31 460,790 460,700 505,655 530,655 565,620 565,604.95 591.78,578.17 U2.30
pads on no net: J1.A8 J1.B8 J1.MH J1.SH J2.A8 J2.B8 J2.MH J2.SH U2.4 U2.5 U2.6 U2.10 U2.12 U2.13 U2.14 U2.16

## Polygon pours and split planes (outlines as drawn)
GND on L1 (Sig) "GND_L01_P004" (solid, pour order 4): 226.65,1607.84 666.66,1607.84 cw(c666.66,1418.69) 769.64,1577.36 cw(c637.66,1373.91) 825.34,1527.5 cw(c667.05,1397.87) 871.66,1397.84 871.66,227.84 cw(c657.83,241.67) 671.66,27.84 226.66,27.84 cw(c236.65,242.84) 21.66,252.84 21.66,359.2 cw(c45.84,358.66) 46.66,382.84 ccw(c129.12,14736.16) 186.63,382.72 ccw(c186.53,407.84) 211.66,407.84 211.66,976.99 ccw(c159.68,970.46) 159.68,1022.84 56.66,1022.84 cw(c56.66,1062.84) 16.66,1062.84 16.66,1419.25 cw(c131.98,1419.25) 21.66,1452.84 cw(c248.36,1366.06)
+VBUS_FILT on L1 (Sig) "+VBUS_FILT_L01_P000" (solid, pour order 0): 585,1200 585,1115 615,1115 ccw(c615,1139.14) 632.07,1122.07 636.46,1126.46 cw(c645,1117.93) 645,1130 680,1130 ccw(c681.25,1151.25) 695,1135 cw(c708.75,1118.76) 710,1140 750,1140 750,1165 665,1165 cw(c665,1201.21) 639.39,1175.61 618.54,1196.46 ccw(c610,1187.94) 610,1200
no net on L2 (GND) "NONET_L02_P003" (solid, pour order 3): 225.42,1602.71 665.43,1602.71 cw(c665.43,1413.57) 768.41,1572.23 cw(c636.43,1368.78) 824.11,1522.37 cw(c665.82,1392.74) 870.43,1392.71 870.43,222.71 cw(c656.6,236.54) 670.43,22.71 225.43,22.71 cw(c235.43,237.71) 20.43,247.71 20.43,354.07 cw(c44.61,353.53) 45.43,377.71 ccw(c127.89,14731.03) 185.4,377.59 ccw(c185.3,402.71) 210.43,402.71 210.43,971.86 ccw(c158.45,965.33) 158.45,1017.71 55.43,1017.71 cw(c55.43,1057.71) 15.43,1057.71 15.43,1414.12 cw(c130.75,1414.12) 20.43,1447.71 cw(c247.13,1360.93)
GND on L3 (GND) "GND_L03_P002" (solid, pour order 2): 225,1604.99 665,1605 cw(c665.01,1415.85) 767.98,1574.52 cw(c636.01,1371.06) 823.69,1524.66 cw(c665.39,1395.03) 870,1395 870,225 cw(c656.17,238.83) 670,25 225,25 cw(c235,240) 20,250 20,356.35 cw(c44.19,355.82) 45,380 ccw(c127.47,14733.32) 184.98,379.88 ccw(c184.88,405) 210,405 210,974.14 ccw(c158.03,967.62) 158.03,1020 55,1020 cw(c55,1060) 15,1060 15,1416.41 cw(c130.32,1416.41) 20,1450 cw(c246.71,1363.22)

## Silkscreen, mask and mechanical layers (free items; w line width, h text height)
Bottom Overlay:
  drawing of 7 lines, arcs and shapes, not listed
Mechanical 1:
  lines w10: 0,1380 cw(c250,1380) 250,1630 275,1630 505,1630 ; 0,1385 0,250 ccw(c250,250) 250,0 650,0 ccw(c650,250) 900,250 900,1380 ccw(c650,1380) 650,1630 500,1630 ; 100,220 ccw(c280,220) 280,40 280,100 cw(c280,220) 160,220 100,220 ; 620,40 ccw(c620,220) 800,220 740,220 cw(c620,220) 620,100 620,40